# Altium PCB STM32G431CBT6 Development Board.PcbDoc
Units mm, origin at the board's own origin, x right, y up, seen from the top; angles counter-clockwise.
Board outline 70 x 50 mm, 2 copper layers (Top Layer, Bottom Layer); 41 components, 59 nets, 207 pads, 22 vias.
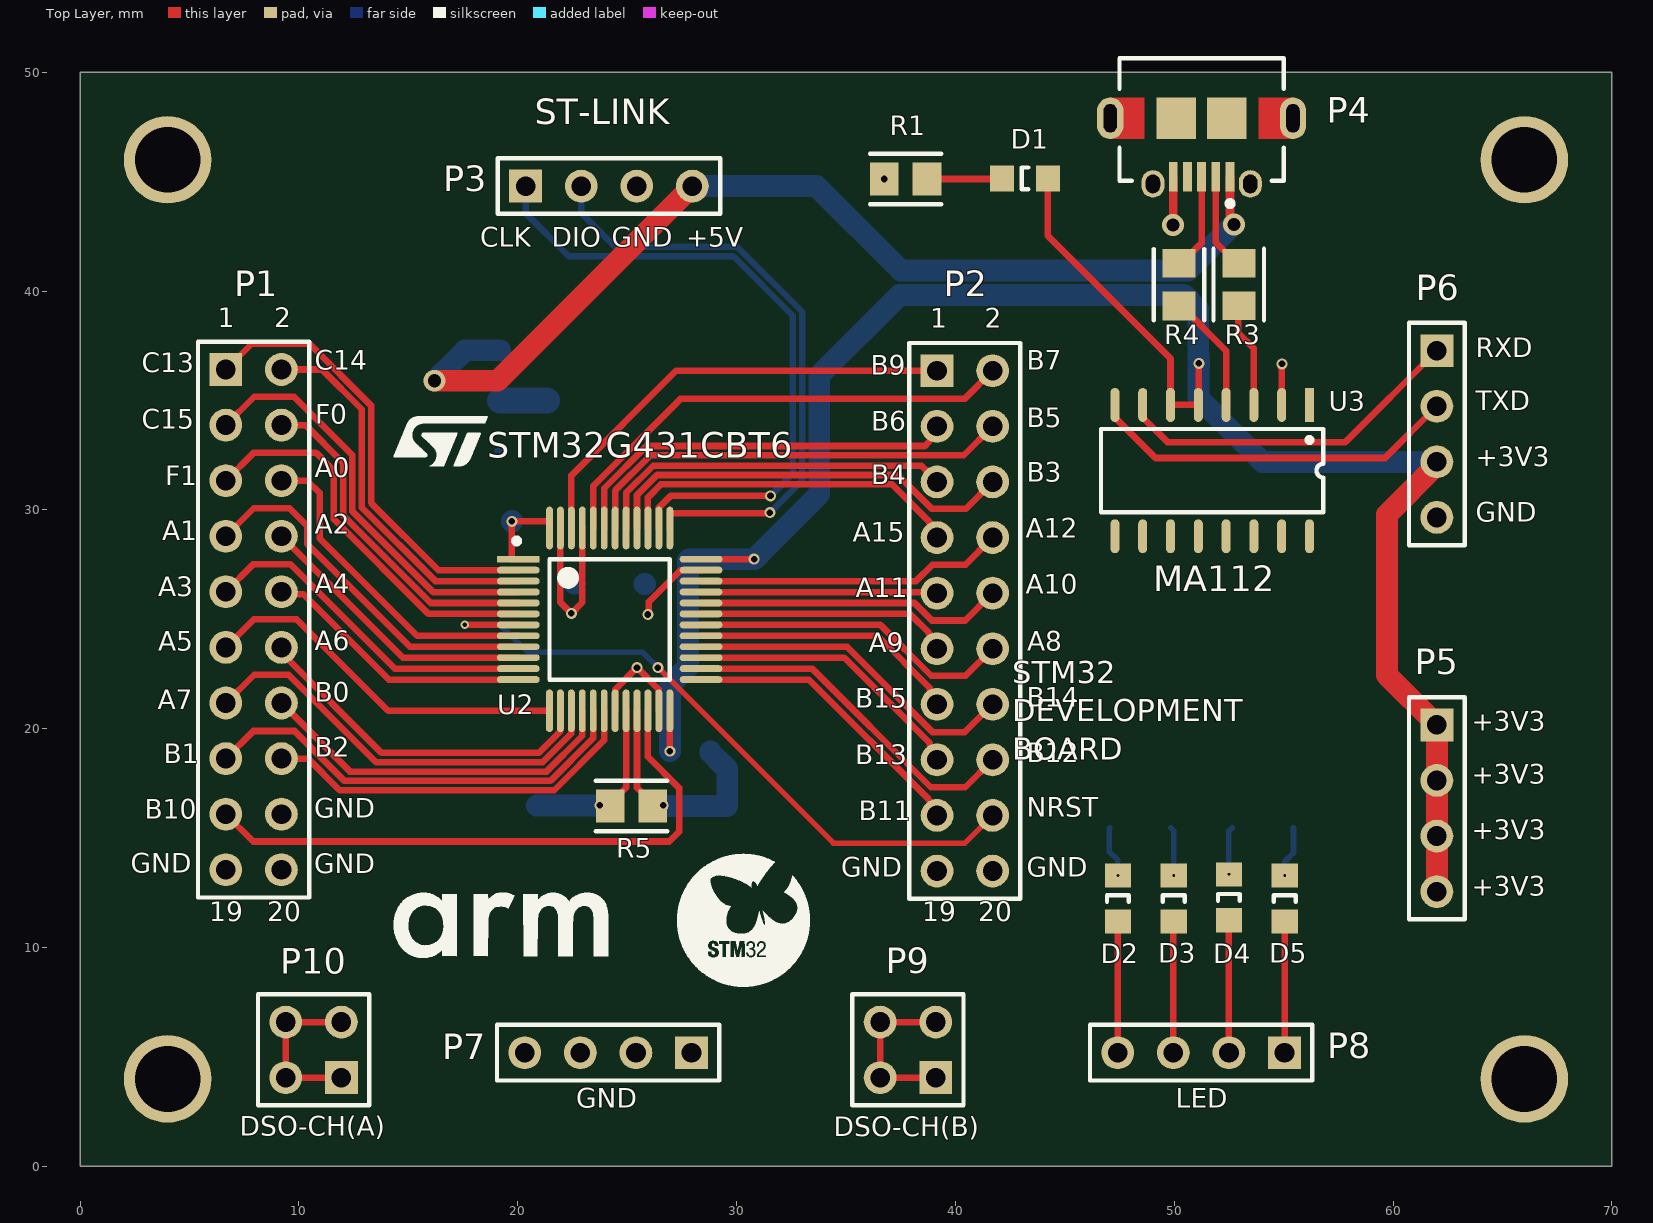
[diagram p0: Top Layer view]
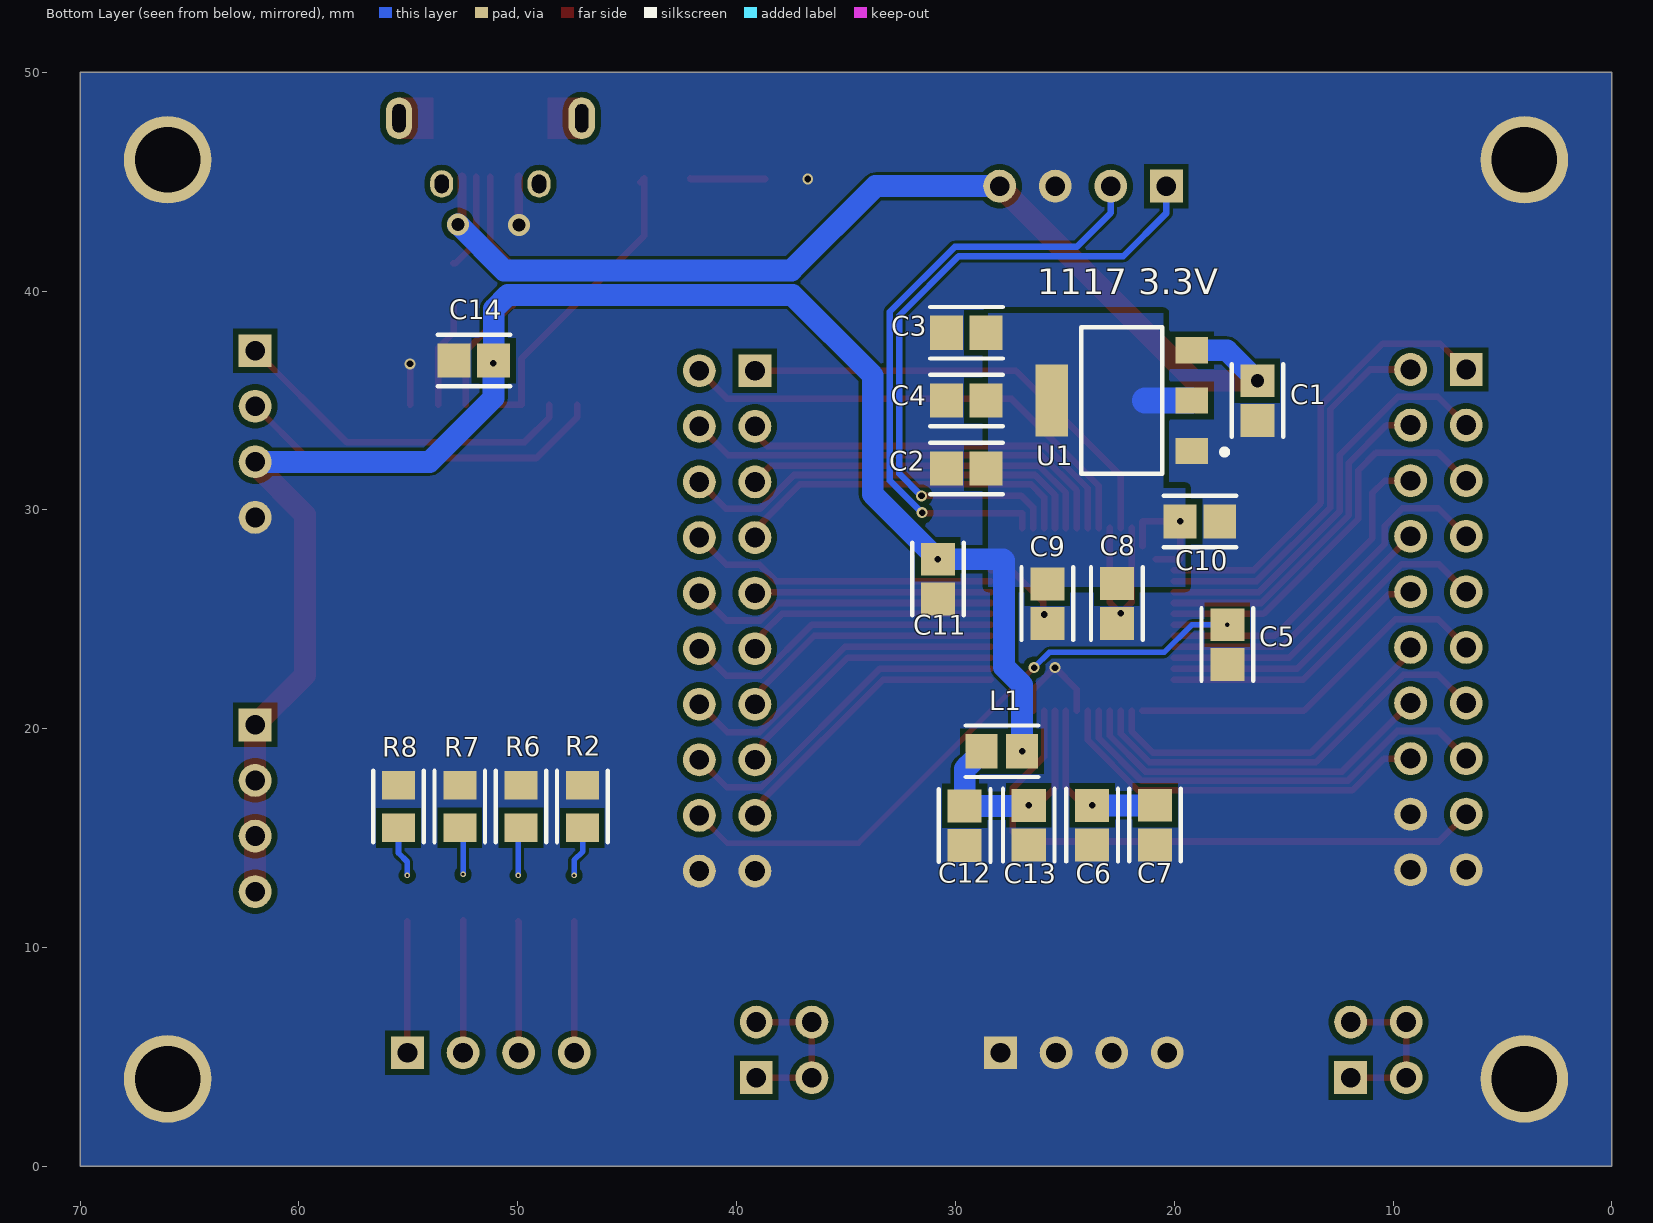
[diagram p1: Bottom Layer view, seen from below]
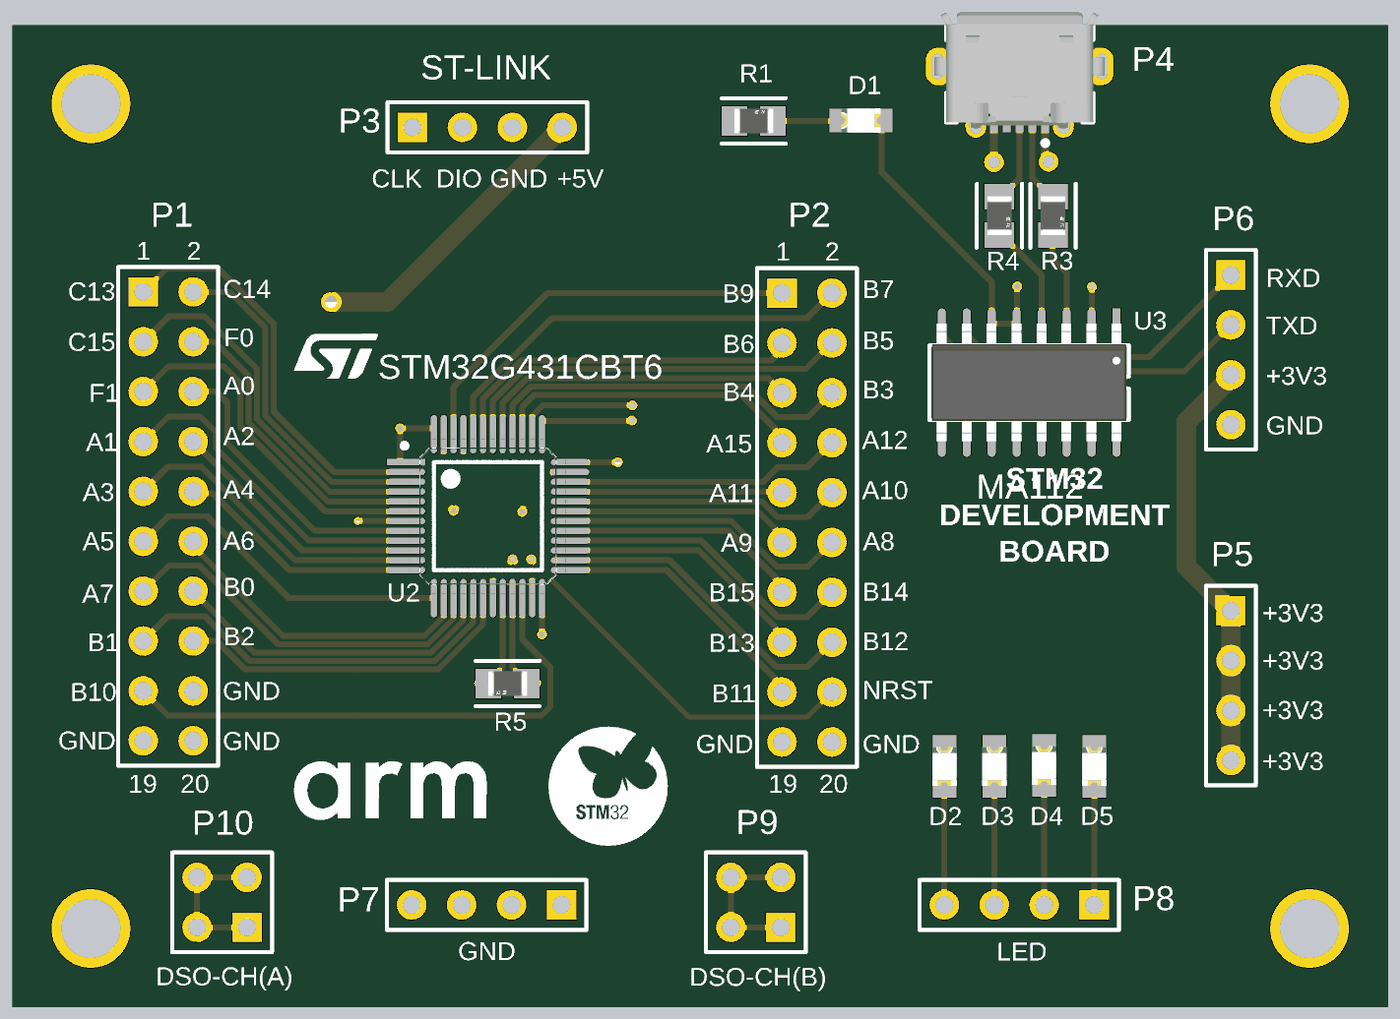
[diagram p2: 3D render of the assembled board from above, using the file's embedded part models]
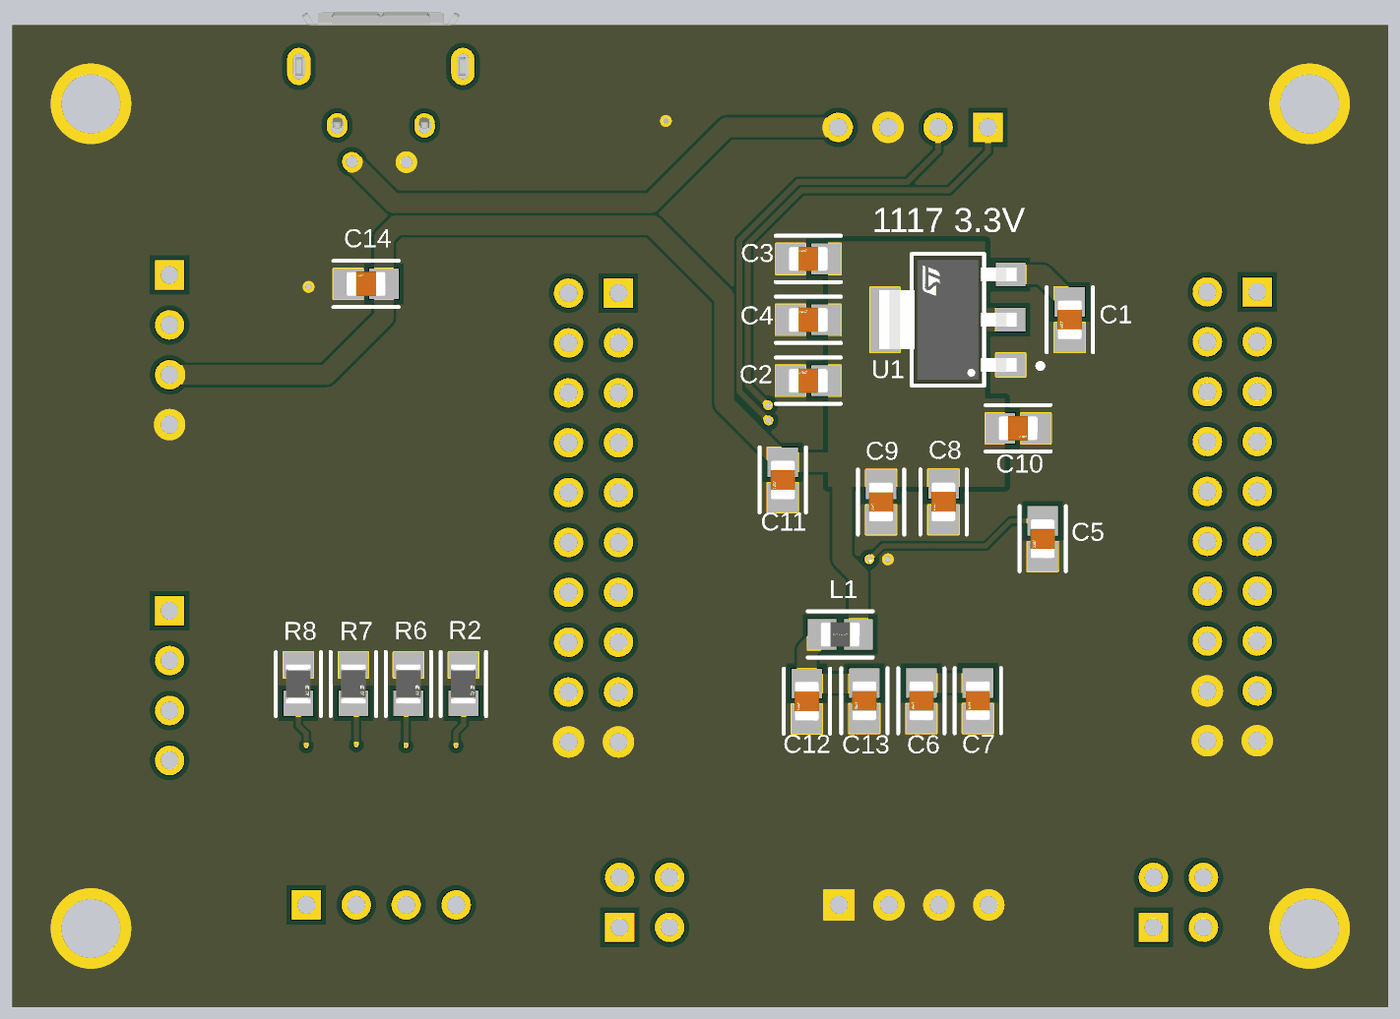
[diagram p3: 3D render of the assembled board from below, using the file's embedded part models]

## Layer stack, top to bottom
Top Solder: solder mask 0.0102, Solder Resist, Dk 3.5
Top Layer: signal copper 0.0356
Dielectric 1: dielectric 0.32, FR-4, Dk 4.8
Bottom Layer: signal copper 0.0356
Bottom Solder: solder mask 0.0102, Solder Resist, Dk 3.5

## Board outline
0,0 70,0 70,50 0,50

## Design rules (kind name [scope] priority, off if disabled: settings)
Clearance [All] p1: gap=0.254 ignorepadtopadclearanceinfootprint=FALSE except(0: Arc-Hole Track-Hole SMDPad-Via SMDPad-Hole THPad-Hole Via-Hole Fill-Hole Poly-Hole Region-Hole Text-Hole; 0.127: Arc-Arc Arc-Track Arc-SMDPad Arc-THPad Arc-Via Arc-Fill Arc-Poly Arc-Region Arc-Text Track-Track Track-SMDPad Track-THPad Track-Via Track-Fill Track-Poly Track-Region Track-Text SMDPad-SMDPad SMDPad-THPad)
ComponentClearance [All] p1: gap=0 collisioncheckmode=3 verticalgap=0 showdistances=FALSE
HoleSize [All] p1: absolutevalues=TRUE maxlimit=5 minlimit=0.025 maxpercent=80.000 minpercent=20.000
MinimumSolderMaskSliver [All] p1: minsoldermaskwidth=0.076
PolygonConnect [All] p1: connectstyle=Direct reliefconductorwidth=0.254 reliefentries=4 polygonreliefangle="90 Angle" airgapwidth=0.254
RoutingVias [All] p1: holewidth=0.711 width=1.27 viastyle="Through Hole" minholewidth=0.711 minwidth=1.27 maxholewidth=0.711 maxwidth=1.27
SilkToSilkClearance [All] p1: silktosilkclearance=0.051
SilkToSolderMaskClearance [IsPad] p1: minsilkscreentomaskgap=0.051 clearancetoexposedcopper=TRUE
SolderMaskExpansion [All] p1: expansion=0.051 istentingtop=FALSE
Width [All] p1: maxlimit=2 minlimit=0.254 preferedwidth=0.3 bottomlayer_prefwidth=0.254 minimp=50.000000 maximp=50.000000 favimp=50.000000
25 further rules are at their usual default settings.

## Components (designator, comment, footprint, x,y, rotation, side; value= is the part's Value field where it differs from the comment)
C1 "4.7uF" FP-0805-L_2_01_0_2-W_1_25-IPC_A 16.2,35 r270 bottom locked
C2 "10nF" FP-0805-L_2_01_0_2-W_1_25-IPC_A 29.5,31.9 r0 bottom locked
C3 "4.7uF" FP-0805-L_2_01_0_2-W_1_25-IPC_A 29.5,38.1 r0 bottom locked
C4 "4.7uF" FP-0805-L_2_01_0_2-W_1_25-IPC_A 29.5,35 r0 bottom locked
C5 "100nF" FP-0805-L_2_01_0_2-W_1_25-IPC_A 17.575,23.85 r270 bottom locked
C6 "1uF" FP-0805-L_2_01_0_2-W_1_25-IPC_A 23.75,15.594 r270 bottom locked
C7 "100nF" FP-0805-L_2_01_0_2-W_1_25-IPC_A 20.875,15.6 r270 bottom locked
C8 "4.7uF" FP-0805-L_2_01_0_2-W_1_25-IPC_A 22.625,25.725 r270 bottom locked
C9 "100nF" FP-0805-L_2_01_0_2-W_1_25-IPC_A 25.8,25.719 r270 bottom locked
C10 "100nF" FP-0805-L_2_01_0_2-W_1_25-IPC_A 18.825,29.475 r180 bottom locked
C11 "100nF" FP-0805-L_2_01_0_2-W_1_25-IPC_A 30.8,26.844 r270 bottom locked
C12 "10nF" FP-0805-L_2_01_0_2-W_1_25-IPC_A 29.575,15.575 r270 bottom locked
C13 "1uF" FP-0805-L_2_01_0_2-W_1_25-IPC_A 26.65,15.594 r270 bottom locked
C14 "100nF" FP-0805-L_2_01_0_2-W_1_25-IPC_A 52.006,36.825 r0 bottom locked
D1 "LED GREEN" 0805_A 43.175,45.15 r0 top locked
D2 "LED GREEN" 0805_A 47.425,12.25 r270 top locked
D3 "LED GREEN" 0805_A 49.975,12.25 r270 top locked
D4 "LED GREEN" 0805_A 52.5,12.3 r270 top locked
D5 "LED GREEN" 0805_A 55.05,12.25 r270 top locked
L1 "10uH" FP-LB2012-1_25-0_2-IPC_A 27.876,18.975 r0 bottom locked
P1 "Header 10X2" HDR2X10 6.66,36.42 r270 top locked
P2 "Header 10X2" HDR2X10 39.16,36.36 r270 top locked
P3 "Header 4" HDR1X4 20.36,44.8 r0 top locked
P4 "Micro USB 2.0 TYPE B" MOLX-47589-0001_V 51.25,46.4 r180 top locked
P5 "Header 4" HDR1X4 62,20.18 r270 top locked
P6 "Header 4" HDR1X4 62,37.28 r270 top locked
P7 "Header 4" HDR1X4 27.94,5.2 r180 top locked
P8 "Header 4" HDR1X4 55.04,5.2 r180 top locked
P9 "Header 2X2" HDR2X2 39.1,4.06 r90 top locked
P10 "Header 2X2" HDR2X2 11.94,4.06 r90 top locked
R1 "1k" FP-RN732A-IPC_A 37.725,45.125 r0 top locked value=1.0KΩ
R2 "1k" FP-RN732A-IPC_A 47.05,16.45 r270 bottom locked value=1.0KΩ
R3 "22E" FP-RN732A-IPC_A 52.95,40.3 r270 top locked value=1.0KΩ
R4 "22E" FP-RN732A-IPC_A 50.225,40.299 r270 top locked value=1.0KΩ
R5 "0E" FP-RN732A-IPC_A 25.2,16.475 r180 top locked value=1.0KΩ
R6 "1k" FP-RN732A-IPC_A 49.85,16.451 r270 bottom locked value=1.0KΩ
R7 "1k" FP-RN732A-IPC_A 52.65,16.451 r270 bottom locked value=1.0KΩ
R8 "1k" FP-RN732A-IPC_A 55.45,16.45 r270 bottom locked value=1.0KΩ
U1 "LD1117S33CTR" FP-SOT-223-0046067_14-MFG 22.4,35 r0 bottom locked
U2 "STM32G431CBT6" FP-LQFP48-5B-IPC_A 24.2,25 r0 top locked
U3 "MA112AS16" SOP16 56.18,34.8 r270 top locked

## Footprints (in the part's own frame and the unit in brackets; to place one, negate y for a bottom-side part, rotate by r counter-clockwise, add the part's x,y. Pads: shape width x height; smd on the part's side, far side on the other; paste and mask are expansions set on the pad)
0805_A [mm] "Chip LED, 2-Leads, Body 2.0x1.3mm, IPC Medium Density"
  rect 1.1x1.2 smd: 1(-1.05,0) 2(1.05,0)
  silkscreen extent -0.15,-0.5 0.15,0.5, body extent -1,-0.62 1,0.63, height 0.68
FP-0805-L_2_01_0_2-W_1_25-IPC_A [mm]
  rect 1.505x1.556 smd: 1(-0.906,0) 2(0.906,0)
  silkscreen extent -1.66,-1.18 1.66,1.18, body extent -1,-0.63 1,0.63, height 0.94
FP-LB2012-1_25-0_2-IPC_A [mm]
  rect 1.455x1.556 smd: 1(-0.926,0) 2(0.926,0)
  silkscreen extent -1.65,-1.18 1.65,1.18, body extent -1,-0.63 1,0.63, height 1.45
FP-LQFP48-5B-IPC_A [mm]
  rect 1.955x0.312 smd: 1(-4.175,2.75)
  rrect100% 1.955x0.312 smd: 2(-4.175,2.25) 3(-4.175,1.75) 4(-4.175,1.25) 5(-4.175,0.75) 6(-4.175,0.25) 7(-4.175,-0.25) 8(-4.175,-0.75) 9(-4.175,-1.25) 10(-4.175,-1.75) 11(-4.175,-2.25) 12(-4.175,-2.75) 25(4.175,-2.75) 26(4.175,-2.25) 27(4.175,-1.75) 28(4.175,-1.25) 29(4.175,-0.75) 30(4.175,-0.25) 31(4.175,0.25) 32(4.175,0.75) 33(4.175,1.25) 34(4.175,1.75) 35(4.175,2.25) 36(4.175,2.75)
  rrect100% 0.312x1.955 smd: 13(-2.75,-4.175) 14(-2.25,-4.175) 15(-1.75,-4.175) 16(-1.25,-4.175) 17(-0.75,-4.175) 18(-0.25,-4.175) 19(0.25,-4.175) 20(0.75,-4.175) 21(1.25,-4.175) 22(1.75,-4.175) 23(2.25,-4.175) 24(2.75,-4.175) 37(2.75,4.175) 38(2.25,4.175) 39(1.75,4.175) 40(1.25,4.175) 41(0.75,4.175) 42(0.25,4.175) 43(-0.25,4.175) 44(-0.75,4.175) 45(-1.25,4.175) 46(-1.75,4.175) 47(-2.25,4.175) 48(-2.75,4.175)
  silkscreen extent -4.38,-2.75 2.75,3.71, body extent -5.65,-5.65 5.65,5.65, height 0.25
FP-RN732A-IPC_A [mm]
  rect 1.306x1.508 smd: 1(-0.976,0) 2(0.976,0)
  silkscreen extent -1.63,-1.15 1.63,1.15, body extent -2.13,-1.25 2.13,1.25, height 0.25
FP-SOT-223-0046067_14-MFG [mm]
  rect 1.5x1.2 smd: 1(-3.2,2.3) 2(-3.2,0) 3(-3.2,-2.3)
  rect 1.5x3.3 smd: 4(3.2,0)
  silkscreen extent -4.82,-3.35 1.85,3.35, body extent -3.5,-3.25 3.5,3.25, height 1.9
HDR1X4 [mm] "Connector; Header; 4 Position"
  rect 1.5x1.5 hole 0.9: 1(0,0)
  round 1.5 hole 0.9: 2(2.54,0) 3(5.08,0) 4(7.62,0)
  silkscreen extent -1.27,-1.27 8.89,1.27
HDR2X2 [mm] "Connector; Header; 2x2 Position"
  rect 1.5x1.5 hole 0.9: 1(0,0)
  round 1.5 hole 0.9: 2(0,2.54) 3(2.54,0) 4(2.54,2.54)
  silkscreen extent -1.27,-1.27 3.81,3.81
HDR2X10 [mm] "Connector; Header; 10x2 Position"
  rect 1.5x1.5 hole 0.9: 1(0,0)
  round 1.5 hole 0.9: 2(0,2.54) 3(2.54,0) 4(2.54,2.54) 5(5.08,0) 6(5.08,2.54) 7(7.62,0) 8(7.62,2.54) 9(10.16,0) 10(10.16,2.54) 11(12.7,0) 12(12.7,2.54) 13(15.24,0) 14(15.24,2.54) 15(17.78,0) 16(17.78,2.54) 17(20.32,0) 18(20.32,2.54) 19(22.86,0) 20(22.86,2.54)
  silkscreen extent -1.27,-1.27 24.13,3.81
MOLX-47589-0001_V [mm] "SMD, 5-Leads, Body 7.5x5.6mm, Pitch 0.65mm"
  rect 0.4x1.35 smd: 1(-1.3,1.175) 2(-0.65,1.175) 3(0,1.175) 4(0.65,1.175) 5(1.3,1.175)
  oval 1.05x1.25 hole 0.65 slot 0.85 at 90 deg: 6(-2.225,1.5) 7(2.225,1.5)
  oval 1.2x1.9 hole 0.6 slot 1.3 at 90 deg: 8(-4.175,-1.5) 11(4.175,-1.5)
  rect 1.8x1.9 smd: 9(-1.15,-1.5) 10(1.15,-1.5)
  Top Layer region: 2.6,-2.45 4.175,-2.45 4.175,-0.55 2.6,-0.55
  Top Layer region: -2.6,-0.55 -4.175,-0.55 -4.175,-2.45 -2.6,-2.45
  silkscreen extent -3.75,-4.25 3.75,2.52, body extent -4.32,-4.25 4.32,1.64, height 2.74
SOP16 [mm]
  rect 1.55x0.41 smd: 1(0,0)
  oval 1.55x0.41 smd: 2(0,-1.27) 3(0,-2.54) 4(0,-3.81) 5(0,-5.08) 6(0,-6.35) 7(0,-7.62) 8(0,-8.89) 9(6,-8.89) 10(6,-7.62) 11(6,-6.35) 12(6,-5.08) 13(6,-3.81) 14(6,-2.54) 15(6,-1.27) 16(6,0)
  silkscreen extent 1.1,-9.53 4.9,0.64, body extent 0,-9.4 5.98,0.5, height 1.35

## Part data
C1 C2 C3 C4 C6 C8 C12 C13: library part CMP-2000-05808-2, "General Purpose Ceramic Capacitor, 0805, 100nF, 5%, X7R, 0.15, 50V", Capacitance=100nF, Case Code (Imperial)=0805, Case Code (Metric)=2012, Dielectric=X7R, Dielectric Material=Ceramic, Insulation Resistance=100GR, Max Operating Temperature=125°C, Min Operating Temperature=-55°C, Package Quantity=1, Tolerance=5%, Voltage=50V, Case/Package=0805, Contact Plating=Tin, Depth=1.25mm, Dissipation Factor=2.5%, Height=0.94mm, Lead Free="Lead Free", Length=2.01mm, Mount="Surface Mount", Number of Pins=2, Packaging="Tape and Reel", Radiation Hardening=No, REACH SVHC="No SVHC", RoHS Compliant=Yes, Termination=SMD/SMT, Thickness=0.037inch, Voltage Rating=50V, Voltage Rating (DC)=50V, Width=0.049inch
C5 C7 C9 C10 C11 C14: library part CMP-2000-05808-2, "General Purpose Ceramic Capacitor, 0805, 100nF, 5%, X7R, 0.15, 50V", Case Code (Imperial)=0805, Case Code (Metric)=2012, Dielectric=X7R, Dielectric Material=Ceramic, Insulation Resistance=100GR, Max Operating Temperature=125°C, Min Operating Temperature=-55°C, Package Quantity=1, Tolerance=5%, Voltage=50V, Capacitance=100nF, Case/Package=0805, Contact Plating=Tin, Depth=1.25mm, Dissipation Factor=2.5%, Height=0.94mm, Lead Free="Lead Free", Length=2.01mm, Mount="Surface Mount", Number of Pins=2, Packaging="Tape and Reel", Radiation Hardening=No, REACH SVHC="No SVHC", RoHS Compliant=Yes, Termination=SMD/SMT, Thickness=0.037inch, Voltage Rating=50V, Voltage Rating (DC)=50V, Width=0.049inch
D1 D2 D3 D4 D5: library part CMP-1426-00007-1, "SMD mono-color Chip LED, WL-SMCW, Green", Color=Green, Manufacturer="Wuerth Elektronik", PartNumber=150080GS75000, ComponentLink1Description="Manufacturer URL", ComponentLink1URL=http://www.we-online.com, ComponentLink2Description=Datasheet, ComponentLink2URL=http://katalog.we-online.com/led/datasheet/150080GS75000.pdf, PackageReference=0805_A
L1: library part CMP-14484-000421-1, "SMD Inductors 10uH ±10% 0.15A 0.468Ω 0805", Case Code (Imperial)=0805, Case Code (Metric)=2012, Current Rating=150mA, DC Resistance (DCR)=360mR, Inductance Tolerance=10%, Max Operating Temperature=105°C, Min Operating Temperature=-40°C, Package Quantity=3000, Resistor Type=Wirewound, Self Resonant Frequency=32MHz, Test Frequency=2.52MHz, Case/Package=0805, Core Material=Ferrite, DC Current=150mA, Depth=1.45mm, Halogen Free="Halogen Free", Height=1.6mm, Height - Seated (Max)=0.057inch, Inductance=10uH, Lead Free="Lead Free", Lead Pitch=1mm, Length=0.079inch, Max DC Current=150mA, Military Standard=Not, Mount="Surface Mount", Packaging="Tape and Reel", Radiation Hardening=No, RoHS Compliant=Yes, Series=LB, Shielding=Unshielded, Termination=SMD/SMT, Tolerance=10%, Weight=0.000194oz, Width=1.6mm
P1 P2: "Header, 10-Pin, Dual row", LatestRevisionDate=17-Jul-2002, LatestRevisionNote="Re-released for DXP Platform.", Publisher="Altium Limited"
P3 P5 P6 P7 P8: "Header, 4-Pin", LatestRevisionDate=17-Jul-2002, LatestRevisionNote="Re-released for DXP Platform.", Publisher="Altium Limited"
P4: library part CMP-2000-05610-1, "Right Angle Female Type AB Micro USB Connector, 30 V, 1.8 A, -30 to 85 degC, RoHS, Tape and Reel", Color=Black, Current Rating=1.8A, Manufacturer=Molex, Operating Temperature Range=-20Cto+85C, Package Description="Micro USB Connector, Pitch 0.65 mm, 5 Positions, Body 7.5 x 5.6 mm", Package Reference=47589-0001, Voltage Rating=30VAC, Brand=Molex, Connector Type=MicroUSBTypeABreceptacle, Contact Material=CopperAlloy, Contact Plating=Gold, Datasheet URL=http://www.molex.com/webdocs/datasheets/pdf/en-us/0475890001_IO_CONNECTORS.pdf, Datasheet Version=12/2016, Gender=Female, Manufacturer URL=http://www.molex.com/, Mounting Angle=Right, Mounting Technology=SurfaceMount, Number of Contacts=5Contact, Number of Ports=1Port, Package URL=http://www.molex.com/pdm_docs/sd/475890001_sd.pdf, Packaging=Reel, Product=MicroUSBTypeABConnectors, Product Category=USBConnectors, RoHS=True, Series=47589, Standard=USB, Termination Style=SMD/SMT
P9 P10: "Header, 2-Pin, Dual row", LatestRevisionDate=17-Jul-2002, LatestRevisionNote="Re-released for DXP Platform.", Publisher="Altium Limited"
R1 R2 R3 R4 R5 R6 R7 R8: library part CMP-03211-001647-1, "SMD Chip Resistor, Thin Film, 1.0KΩ, 100 V, 0805 [2012 Metric], 100 mW, 0.1%, RN73 Series", Manufacturer="TE Connectivity", Manufacturer Part Number=RN73C2A1K0BTDF, Package=RN732A, Power Rating=0.1W, Resistance=1.0KΩ, Temperature="-55°C to 155°C", Temperature Coefficient=10ppm/°C, Temperature Range High=155°C, Temperature Range Low=-55°C, Tolerance=0.1%, Voltage Rating=100V, Automotive=No, Category=Res, ComponentLink2Description=Datasheet, ComponentLink2URL=https://www.te.com/commerce/DocumentDelivery/DDEController?Action=showdoc&DocId=Data+Sheet%7F1773270%7FP%7Fpdf%7FEnglish%7FENG_DS_1773270_P.pdf%7F1676162-2, Composition="Thin Film", Device Class L1="Passive Components", Device Class L2=Resistors, Device Class L3="Chip SMD Resistors", Height=0.65mm, Ipc Land Pattern Name=RESC200125X55, Lead Free=Yes, Octopart=https://octopart.com/rn73c2a1k0btdf-te+connectivity-55583822, octopart_url=https://octopart.com/rn73c2a1k0btdf-te+connectivity-55583822, Packaging="1000 Reel", RoHS=TRUE, Series=RN73
U1: library part CMP-0244-00307-2, "IC REG LINEAR 3.3V 800MA SOT223", Case/Package=SOT-223, Dropout Voltage=1.1V, Input Bias Current=5mA, Max Input Voltage=15V, Max Operating Temperature=125°C, Max Output Current=1.3A, Max Output Voltage=3.3V, Max Power Dissipation=12W, Min Input Voltage=5.3V, Min Operating Temperature=-40°C, Output Current=950mA, Output Voltage Accuracy=1%, Package Quantity=1, Quiescent Current=10mA, Accuracy=1%, Contact Plating=Tin, Height=1.8mm, Lead Free="Lead Free", Length=6.5mm, Max Supply Voltage=15V, Min Output Voltage=3.3V, Min Supply Voltage=3.3V, Mount="Surface Mount", Nominal Output Voltage=3.3V, Number of Outputs=1, Number of Pins=4, Number of Regulators=1, Number of Terminals=4, Output Type=Fixed, Output Voltage=3.3V, Packaging="Tape and Reel", Polarity=Positive, Power Dissipation=12W, Radiation Hardening=No, REACH SVHC="No SVHC", Termination=SMD/SMT, Weight=0.01lb, Width=3.5mm
U2: library part CMP-12105-000030-1, "MAINSTREAM ARM CORTEX-M4+ MCU 17", Ambient Temperature Range High=+85°C, Ambient Temperature Range Low=-40°C, Frequency=170MHz, Manufacturer=STMicroelectronics, Max Junction Temp=+105°C, Max Supply Voltage=3.6V, Min Supply Voltage=1.62V, Package=LQFP48-5B, Temperature="-40°C to +85°C", Automotive=No, Category=IC, ComponentLink2Description=Datasheet, ComponentLink2URL=https://www.st.com/resource/en/datasheet/stm32g431cb.pdf, Core Architecture="Arm Cortex-M4", Data Bus Width=32bits, Device Class L1="Integrated Circuits (ICs)", Device Class L2="Embedded Processors and Controllers", Device Class L3=Microcontrollers, Digikey Description="MAINSTREAM ARM CORTEX-M4+ MCU 17", Height=1.6mm, Interface=I2C,SPI,UART,USART,CAN,USB,LIN,IrDA,I2S, Lead Free=Yes, Manufacturer Part Number=STM32G431CBT6, Memory Size=128KBytes, Memory Type=FLASH, Number Of A/D Converters=1, Number Of Adc Channels=17, Number Of Cores=1, Number Of I2C Channels=3, Number Of I/Os=38, Number Of Pwm Channels=31, Number Of Spi Channels=3, Number Of Timers/Counters=14, Number Of Uart Channels=4, Number Of Usb Channels=1, Octopart=https://octopart.com/stm32g431cbt6-stmicroelectronics-98835224, Ram Size=32KBytes, RoHS=TRUE, Standoff Height=0.05mm, Temperature Range High=+85°C, Temperature Range Low=-40°C

## Free pads (board coordinates)
  round 4 hole 3: ""(4,4) ""(4,46) ""(66,4) ""(66,46)

## Via types
v1: diameter 0.5, hole 0.3, Top Layer to Bottom Layer, 14 vias
v2: diameter 0.254, hole 0.127, Top Layer to Bottom Layer, 4 vias
v3: diameter 1, hole 0.6, Top Layer to Bottom Layer, 3 vias
v4: diameter 0.4, hole 0.2, Top Layer to Bottom Layer, 1 vias

## Nets (pads, with @x,y where several pads share a name; then routed paths per layer and width w, separated by ;. In a path a pad name is that pad's centre, name@x,y a point inside that pad or via, vN(x,y) a via of type N, cw(c..) or ccw(c..) an arc to the next point about the centre after c; other vN are vias at no path point)
+3V3: C2.1 C3.1 C4.1 C8.1 C9.1 C10.1 C11.1 C14.1 D1.2 L1.1 P5.1 P5.2 P5.3 P5.4 P6.3 U1.2 U1.4 U2.1 U2.24 U2.36 U2.48 U3.5 U3.6 | length 106.8
  Top Layer w0.3: U2.1@20.846,27.75 U2.1 19.737,27.75 19.731,27.756 v1(19.731,29.475) 21.444,29.475 21.45,29.469 U2.48 U2.48@21.45,28.354 ; v1(26.95,18.975) U2.24 ; U2.36 v1(30.8,27.75) ; D1.2@44.4,44.975 D1.2 44.225,42.525 49.83,36.92 U3.6 U3.5 51.112,34.812 51.112,36.687 v1(51.125,36.7)
  Top Layer w1: P5.4 P5.3 P5.2 P5.1 59.725,22.455 59.725,29.79 62,32.065 P6.3
  Bottom Layer w0.254: C8.1 C8.1@22.631,26.625
  Bottom Layer w1: v1(19.731,29.475) C10.1@19.731,29.501 ; C8.1@22.599,26.631 C8.1 ; C9.1 C9.1@25.826,26.625 ; v1(26.95,18.975) 26.95,22 27.775,22.825 27.775,27.7 27.825,27.75 v1(30.8,27.75) ; C11.1@30.802,27.752 30.828,27.752 31.078,28.002 31.078,28.028 33.775,30.725 33.775,36.15 37.45,39.825 50.45,39.825 51.098,39.177 51.098,37.103 51.1,37.101 C14.1 51.125,36.8 51.125,36.572 51.1,36.547 51.1,35.125 54.025,32.2 P6.3
  Bottom Layer w1.2: U1.2 21.325,35
+3V3_A: C12.1 C13.1 L1.2 R5.1 U2.21 | length 10.4
  Top Layer w0.3: U2.21 25.45,17.302 26.176,16.576 R5.1
  Bottom Layer w1: v1(26.65,16.5) 26.669,16.481 C12.1 29.575,18.175 29.426,18.324 29.402,18.324 28.801,18.924 L1.2
+5: C1.1 P3.4 P4.1 U1.3 | length 48.7
  Top Layer w0.4: P4.1 52.55,43.387 52.725,43.212 v3(52.725,43.05)
  Top Layer w1: v3(16.2,35.906) 19.086,35.906 P3.4
  Bottom Layer w0.254: U1.3@19.05,37.3 U1.3
  Bottom Layer w1: v3(16.2,35.906) 16.226,35.906 16.478,36.158 16.478,36.184 17.594,37.3 U1.3 ; P3.4 33.65,44.8 37.498,40.952 50.627,40.952 v3(52.725,43.05)
GND: C1.2 C2.2 C3.2 C4.2 C5.2 C6.2 C7.2 C8.2 C9.2 C10.2 C11.2 C12.2 C13.2 C14.2 P1.18 P1.19 P1.20 P2.19 P2.20 P3.3 P4.5 P6.4 P7.1 P7.2 P7.3 P7.4 pad. R1.1 R2.1 R6.1 R7.1 R8.1 U1.1 U2.19 U2.23 U2.35 U2.45 U2.47 U3.2 | length 20.8
  Top Layer w0.3: U2.47 21.95,25.775 v1(22.45,25.275) 22.95,25.775 U2.45 ; U2.19 24.452,20.827 24.452,21.802 v1(25.45,22.8) 26.448,21.802 26.448,20.827 U2.23 ; v1(25.95,25.225) 25.988,25.263 25.988,25.797 27.439,27.248 28.373,27.248 U2.35 ; U3.2 54.918,34.807 54.918,36.667 v1(54.925,36.675)
  Top Layer w0.4: v3(49.95,43.025) P4.5
  Bottom Layer w0.254: U1.1@19.05,32.7 U1.1
  other v1: 36.749,45.125
NetD1_1: D1.1 R1.2 | length 3.4
  Top Layer w0.3: R1.2 42.1,45.125 D1.1
NetD2_1: D2.1 R2.2 | length 2.3
  Bottom Layer w0.254: R2.2 47.025,15.449 47.025,14.4 47.425,14 v2(47.425,13.3)
NetD2_2: D2.2 P8.4 | length 6
  Top Layer w0.3: P8.4 47.42,11.195 D2.2
NetD3_1: D3.1 R6.2 | length 2.2
  Bottom Layer w0.254: R6.2 49.975,15.35 v2(49.975,13.3)
NetD3_2: D3.2 P8.3 | length 6
  Top Layer w0.3: P8.3 49.96,11.185 D3.2
NetD4_1: D4.1 R7.2 | length 2.2
  Bottom Layer w0.254: v2(52.5,13.35) 52.5,15.325 R7.2
NetD4_2: D4.2 P8.2 | length 6.1
  Top Layer w0.3: P8.2 D4.2
NetD5_1: D5.1 R8.2 | length 2.3
  Bottom Layer w0.254: v2(55.05,13.3) 55.05,13.925 55.45,14.325 R8.2
NetD5_2: D5.2 P8.1 | length 6
  Top Layer w0.3: P8.1 55.05,5.21 D5.2
NetP3_1: P3.1 U2.38 | length 30.3
  Top Layer w0.3: U2.38 26.452,29.178 26.452,30.112 26.984,30.644 v1(31.55,30.644)
  Bottom Layer w0.3: P3.1 20.36,43.565 22.329,41.596 29.854,41.596 32.571,38.879 32.571,31.665 v1(31.55,30.644)
NetP3_2: P3.2 U2.37 | length 28.2
  Top Layer w0.3: U2.37 26.95,29.841 26.956,29.847 31.497,29.847 v1(31.525,29.875)
  Bottom Layer w0.3: P3.2 22.9,43.575 24.452,42.023 29.008,42.023 30.03,42.023 32.998,39.056 32.998,31.347 31.526,29.875 v1(31.525,29.875)
NetP4_2: P4.2 R3.1 | length 4.4
  Top Layer w0.3: P4.2 51.9,42.225 52.849,41.276 R3.1
NetP4_3: P4.3 R4.1 | length 4.4
  Top Layer w0.3: R4.1 50.326,41.275 51.25,42.199 P4.3
NetP6_1: P6.1 U3.7 | length 16.2
  Top Layer w0.3: U3.7 48.56,34.23 49.69,33.1 57.82,33.1 P6.1
NetP6_2: P6.2 U3.8 | length 17
  Top Layer w0.3: U3.8 47.29,34.23 49.145,32.375 59.635,32.375 P6.2
NetP9_1: P9.1 P9.2 P9.3 P9.4 | length 7.6
  Top Layer w0.3: P9.1 P9.2 P9.4 P9.3
NetP10_1: P10.1 P10.2 P10.3 P10.4 | length 7.6
  Top Layer w0.3: P10.1 P10.2 P10.4 P10.3
NetR3_2: R3.2 U3.3 | length 4.8
  Top Layer w0.3: R3.2 52.925,39.299 52.925,38.1 53.64,37.385 U3.3
NetR4_2: R4.2 U3.4 | length 5.5
  Top Layer w0.3: R4.2 50.326,39.323 52.37,37.279 U3.4
NRST: C5.1 P2.18 U2.7 | length 31.2
  Top Layer w0.254: v1(26.4,22.8) 34.425,14.775 34.449,14.775 40.435,14.775 P2.18
  Top Layer w0.3: v4(17.575,24.756) 18.408,24.756 18.413,24.75 U2.7
  Bottom Layer w0.254: v4(17.575,24.756) 19.194,24.756 20.461,23.489 25.711,23.489 v1(26.4,22.8)
PA0: P1.6 U2.8 | length 15
  Top Layer w0.3: P1.6 10.385,31.34 10.95,30.775 10.95,28.7 15.4,24.25 U2.8
PA1: P1.7 U2.9 | length 17
  Top Layer w0.3: P1.7 7.935,30.075 9.575,30.075 10.373,29.277 10.373,28.452 15.075,23.75 U2.9
PA2: P1.8 U2.10 | length 13.1
  Top Layer w0.3: P1.8 14.75,23.25 U2.10
PA3: P1.9 U2.11 | length 15.9
  Top Layer w0.3: P1.9 7.925,27.525 9.6,27.525 14.375,22.75 U2.11
PA4: P1.10 U2.12 | length 12.5
  Top Layer w0.3: P1.10 9.304,26.156 10.194,26.156 14.1,22.25 U2.12
PA5: P1.11 U2.13 | length 17
  Top Layer w0.3: P1.11 7.94,25 9.9,25 14.075,20.825 U2.13
PA6: P1.12 U2.14 | length 16.2
  Top Layer w0.3: P1.12 9.2,23.475 13.775,18.9 20.96,18.9 21.948,19.888 21.948,20.822 U2.14
PA7: P1.13 U2.15 | length 19.6
  Top Layer w0.3: P1.13 7.955,22.475 9.525,22.475 13.527,18.473 21.136,18.473 22.448,19.784 22.448,20.822 U2.15
PA8: P2.12 U2.30 | length 14.8
  Top Layer w0.3: U2.30 36.575,24.75 38.9,22.425 40.465,22.425 P2.12
PA9: P2.11 U2.31 | length 11.7
  Top Layer w0.3: U2.31 37.925,25.25 38.789,24.386 38.789,24.356 39.16,23.985 P2.11
PA10: P2.10 U2.32 | length 14.2
  Top Layer w0.3: U2.32 38.125,25.75 38.925,24.95 40.45,24.95 P2.10
PA11: P2.9 U2.33 | length 10.8
  Top Layer w0.3: U2.33 28.378,26.248 39.112,26.248 P2.9
PA12: P2.8 U2.34 | length 14.1
  Top Layer w0.3: U2.34 38.2,26.75 38.95,27.5 40.46,27.5 P2.8
PA15: P2.7 U2.39 | length 16.1
  Top Layer w0.3: U2.39 25.95,30.575 26.546,31.171 37.104,31.171 38.799,29.476 38.799,29.426 39.16,29.065 P2.7
PB0: P1.14 U2.16 | length 16.9
  Top Layer w0.3: P1.14 12.334,18.046 21.313,18.046 22.948,19.68 22.948,20.822 U2.16
PB1: P1.15 U2.17 | length 20.3
  Top Layer w0.3: P1.15 7.92,19.9 9.8,19.9 12.081,17.619 21.49,17.619 23.448,19.576 23.448,20.822 U2.17
PB2: P1.16 U2.18 | length 17.6
  Top Layer w0.3: P1.16 10.41,18.64 11.858,17.192 21.667,17.192 23.948,19.473 23.948,20.822 U2.18
PB3: P2.6 U2.40 | length 19.3
  Top Layer w0.3: U2.40 25.45,30.679 26.369,31.598 37.377,31.598 38.925,30.05 40.47,30.05 P2.6
PB4: P2.5 U2.41 | length 16.7
  Top Layer w0.3: U2.41 24.95,30.783 26.192,32.025 38.456,32.025 39.16,31.321 P2.5
PB5: P2.4 U2.42 | length 20.2
  Top Layer w0.3: U2.42 24.45,30.887 26.061,32.498 40.378,32.498 P2.4
PB6: P2.3 U2.43 | length 18.4
  Top Layer w0.3: U2.43 23.95,30.99 25.885,32.925 38.606,32.925 38.782,33.101 38.782,33.117 39.16,33.495 P2.3
PB7: P2.2 U2.44 | length 22.3
  Top Layer w0.3: U2.44 23.45,31.094 27.431,35.075 40.415,35.075 P2.2
PB9: P2.1 U2.46 | length 21.1
  Top Layer w0.3: U2.46 22.45,31.575 27.235,36.36 P2.1
PB10: P1.17 U2.22 | length 27.5
  Top Layer w0.3: P1.17 7.91,14.85 26.925,14.85 27.375,15.3 27.375,17.3 25.95,18.725 U2.22
PB11: P2.17 U2.25 | length 13.6
  Top Layer w0.3: U2.25 33.3,22.25 38.786,16.764 38.786,16.738 39.16,16.365 P2.17
PB12: P2.16 U2.26 | length 16.1
  Top Layer w0.3: U2.26 33.45,22.75 38.875,17.325 40.445,17.325 P2.16
PB13: P2.15 U2.27 | length 13
  Top Layer w0.3: U2.27 34.925,23.25 38.829,19.346 38.829,19.236 39.16,18.905 P2.15
PB14: P2.14 U2.28 | length 15.5
  Top Layer w0.3: U2.28 35.05,23.75 38.95,19.85 40.43,19.85 P2.14
PB15: P2.13 U2.29 | length 12.3
  Top Layer w0.3: U2.29 36.45,24.25 38.821,21.879 38.821,21.783 39.16,21.445 P2.13
PC13: P1.1 U2.2 | length 20.7
  Top Layer w0.3: P1.1 7.84,37.6 10.479,37.6 13.3,34.779 13.3,30.325 16.375,27.25 U2.2
PC14: P1.2 U2.3 | length 17.5
  Top Layer w0.3: P1.2 11.055,36.42 12.873,34.602 12.873,30.114 16.237,26.75 U2.3
PC15: P1.3 U2.4 | length 19.1
  Top Layer w0.3: P1.3 7.955,35.175 9.775,35.175 12.446,32.504 12.446,29.937 16.133,26.25 U2.4
PF0: P1.4 U2.5 | length 15.6
  Top Layer w0.3: P1.4 10.295,33.88 12.019,32.156 12.019,29.76 16.029,25.75 U2.5
PF1: P1.5 U2.6 | length 18.3
  Top Layer w0.3: P1.5 7.945,32.625 10.775,32.625 11.592,31.808 11.592,29.583 15.925,25.25 U2.6
VREF: C6.1 C7.1 R5.2 U2.20 | length 7.5
  Top Layer w0.3: R5.2 24.224,16.576 24.95,17.302 U2.20
  Bottom Layer w0.254: C7.1 C7.1@20.881,16.5
  Bottom Layer w1: C7.1@20.881,16.5 v1(23.75,16.5)
pads on no net: P4.4 P4.6 P4.7 P4.8 P4.9 P4.10 P4.11 U3.1 U3.9 U3.10 U3.11 U3.12 U3.13 U3.14 U3.15 U3.16

## Polygon pours and split planes (outlines as drawn)
GND on Bottom Layer "GND_L02_P002" (solid, pour order 2): 70,50 70,0 0,0 0,50
+3V3 on Bottom Layer "+3V3_L02_P001" (solid, pour order 1): 28.5,39 28.5,26.5 19.5,26.5 19.5,31 20.5,31 20.5,39

## Silkscreen, mask and mechanical layers (free items; w line width, h text height)
Top Overlay:
  drawing of 7 lines, arcs and shapes, not listed
  text "ST-LINK" at 20.775,47.247 h2
  text "CLK" at 18.275,41.742 h1.5
  text "DIO" at 21.55,41.742 h1.5
  text "GND" at 24.3,41.742 h1.5
  text "+5V" at 27.7,41.742 h1.5
  text "1" at 6.3,38.05 h1.5
  text "2" at 8.874,38.05 h1.5
  text "1" at 38.85,38.025 h1.5
  text "2" at 41.349,38.025 h1.5
  text "RXD" at 63.775,36.675 h1.5
  text "C14" at 10.725,36.117 h1.5
  text "B7" at 43.25,36.1 h1.5
  text "C13" at 2.825,35.992 h1.5
  text "B9" at 36.125,35.892 h1.5
  text "TXD" at 63.775,34.25 h1.5
  text "F0" at 10.75,33.642 h1.5
  text "B5" at 43.25,33.492 h1.5
  text "C15" at 2.825,33.417 h1.5
  text "B6" at 36.15,33.317 h1.5
  text "STM32G431CBT6" at 18.6,31.997 h2
  text "+3V3" at 63.775,31.692 h1.5
  text "A0" at 10.725,31.192 h1.5
  text "B3" at 43.25,30.992 h1.5
  text "B4" at 36.15,30.875 h1.5
  text "F1" at 3.9,30.825 h1.5
  text "GND" at 63.775,29.167 h1.5
  text "A2" at 10.725,28.625 h1.5
  text "A12" at 43.225,28.425 h1.5
  text "A1" at 3.75,28.325 h1.5
  text "A15" at 35.3,28.242 h1.5
  text "A4" at 10.725,25.9 h1.5
  text "MA112" at 49.05,25.9 h2
  text "A10" at 43.225,25.867 h1.5
  text "A3" at 3.575,25.767 h1.5
  text "A11" at 35.45,25.725 h1.5
  text "A6" at 10.725,23.292 h1.5
  text "A5" at 3.575,23.267 h1.5
  text "A8" at 43.275,23.267 h1.5
  text "A9" at 36.05,23.192 h1.5
  text "B0" at 10.725,20.942 h1.5
  text "B14" at 43.25,20.7 h1.5
  text "B15" at 35.425,20.667 h1.5
  text "A7" at 3.55,20.6 h1.5
  text "+3V3" at 63.6,19.617 h1.5
  text "B2" at 10.725,18.425 h1.5
  text "STM32 / DEVELOPMENT / BOARD" at 42.608,18.25 h1.75
  text "B12" at 43.25,18.175 h1.5
  text "B1" at 3.825,18.125 h1.5
  text "B13" at 35.425,18.092 h1.5
  text "+3V3" at 63.6,17.192 h1.5
  text "NRST" at 43.25,15.692 h1.5
  text "GND" at 10.7,15.642 h1.5
  text "B10" at 2.95,15.592 h1.5
  text "B11" at 35.575,15.525 h1.5
  text "+3V3" at 63.6,14.667 h1.5
  text "GND" at 2.325,13.117 h1.5
  text "GND" at 10.7,13.092 h1.5
  text "GND" at 34.775,12.942 h1.5
  text "GND" at 43.25,12.942 h1.5
  text "+3V3" at 63.6,12.067 h1.5
  text "19" at 5.9,10.917 h1.5
  text "20" at 8.549,10.917 h1.5
  text "19" at 38.475,10.917 h1.5
  text "20" at 41.049,10.917 h1.5
  text "GND" at 22.675,2.392 h1.5
  text "LED" at 50.075,2.375 h1.5
  text "DSO-CH(A)" at 7.3,1.108 h1.5
  text "DSO-CH(B)" at 34.45,1.083 h1.5
Bottom Overlay:
  text "1117 3.3V" at 26.25,39.472 h2